# Altium PCB STM32H750-MotherBoard.PcbDoc
Units mil, origin at the board's own origin, x right, y up, seen from the top; angles counter-clockwise.
Board outline 3530.03 x 3200.03 mil, 2 copper layers (Top Layer, Bottom Layer); 45 components, 103 nets, 321 pads, 511 vias.
Unrouted connection lines stored in the file: 34.
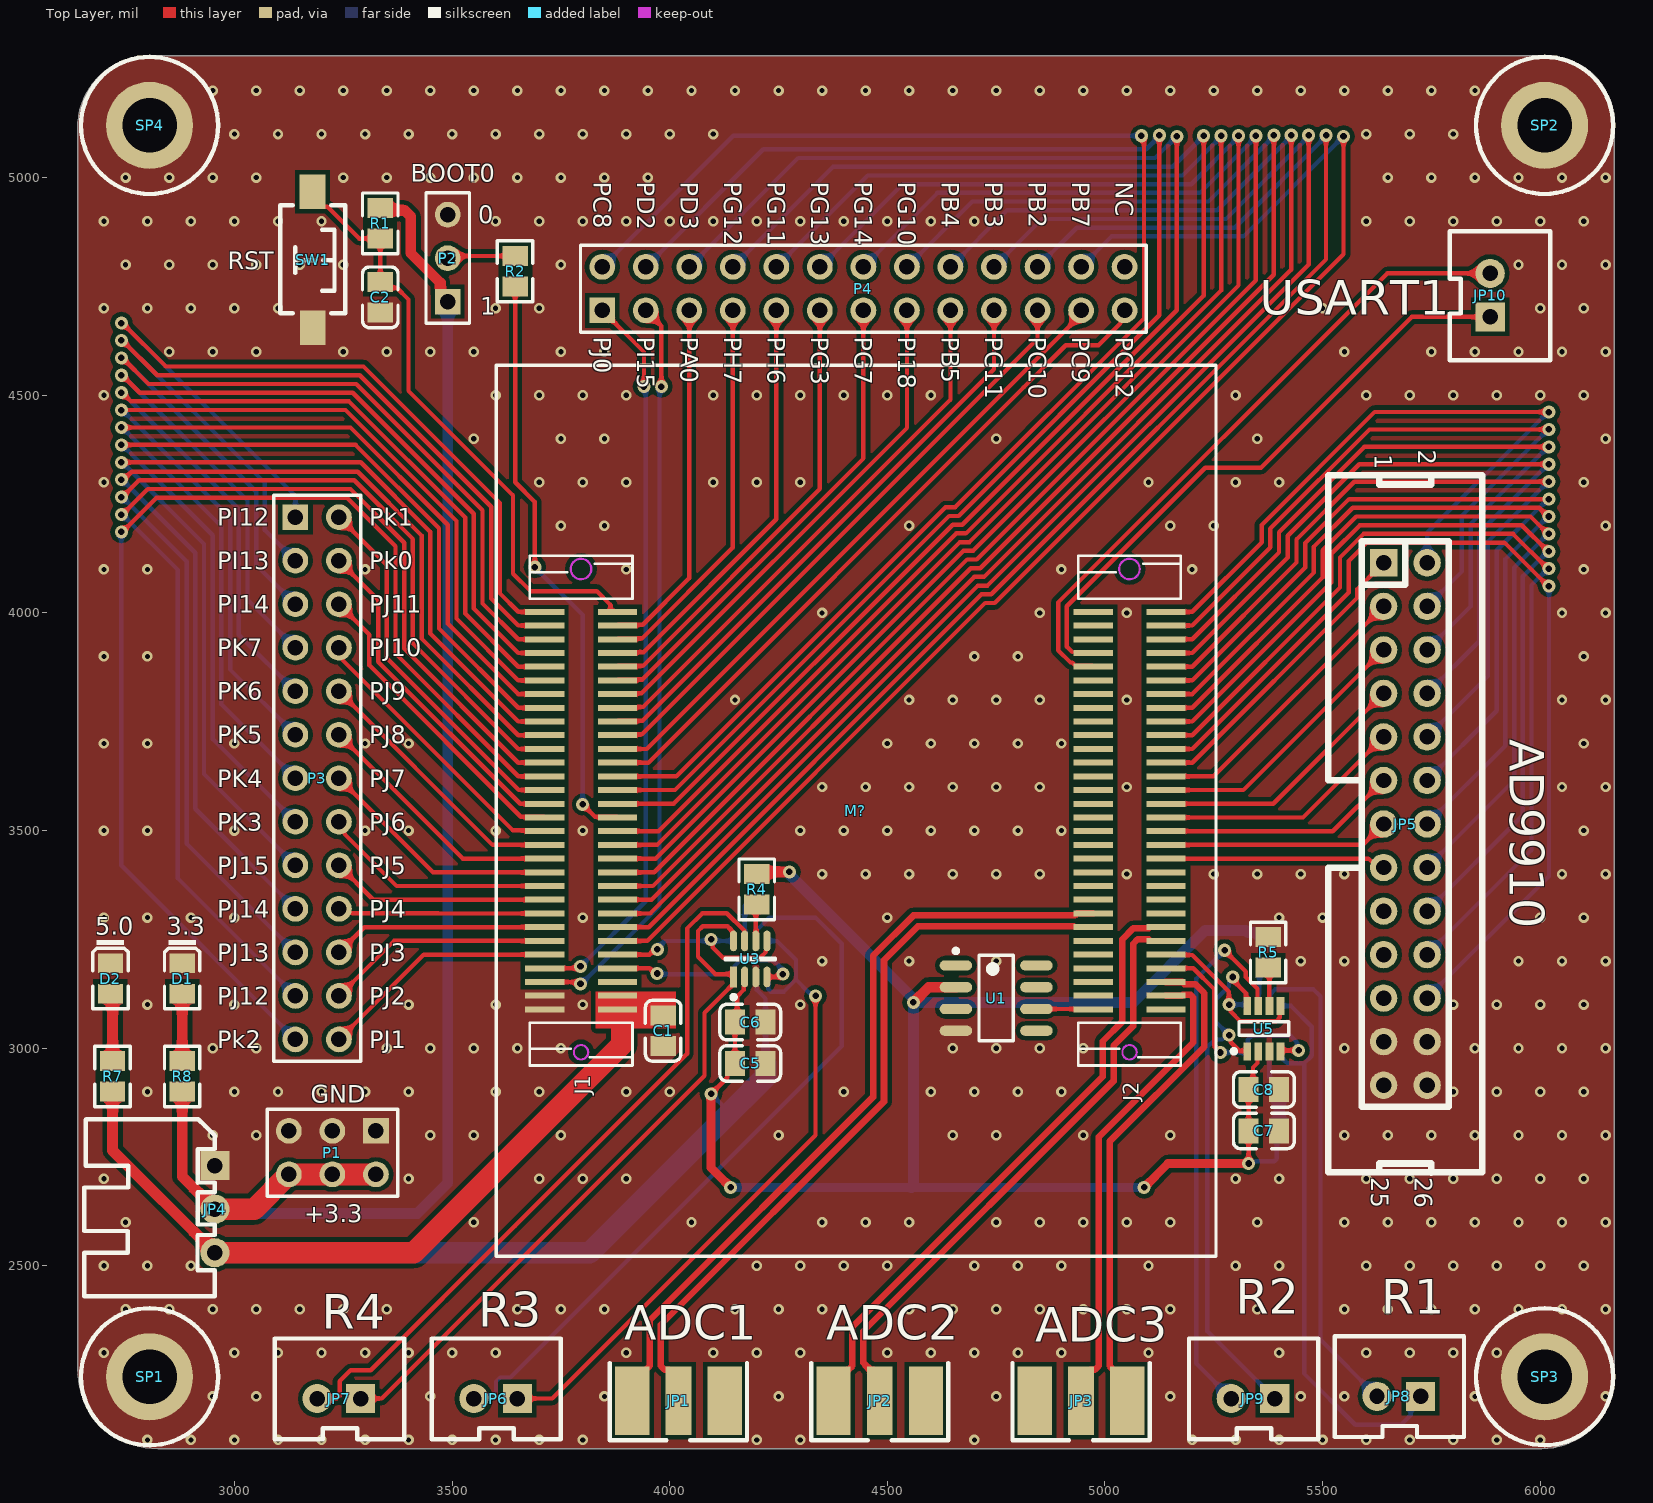
[diagram p0: Top Layer view]
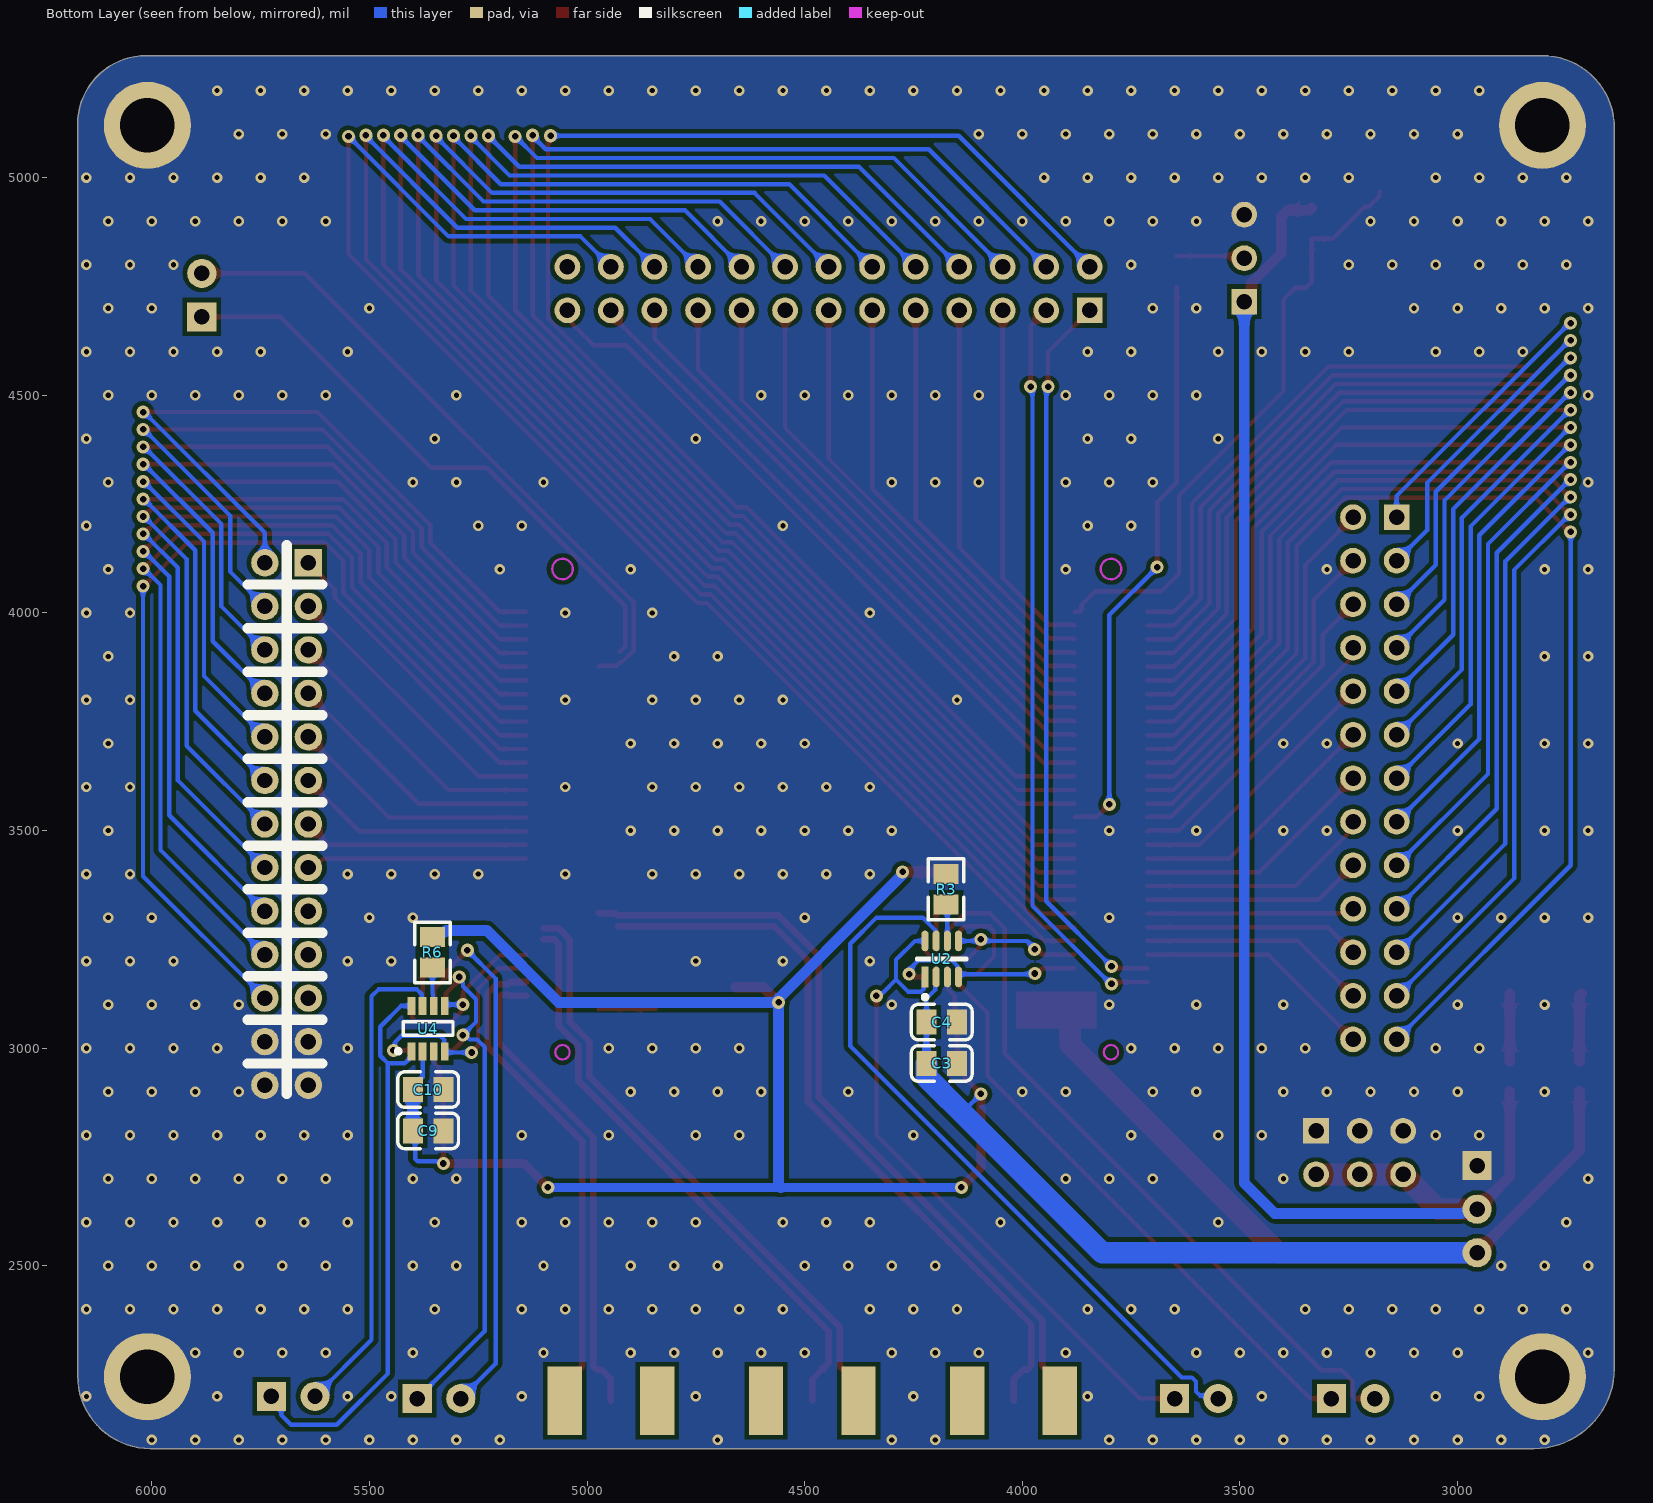
[diagram p1: Bottom Layer view, seen from below]
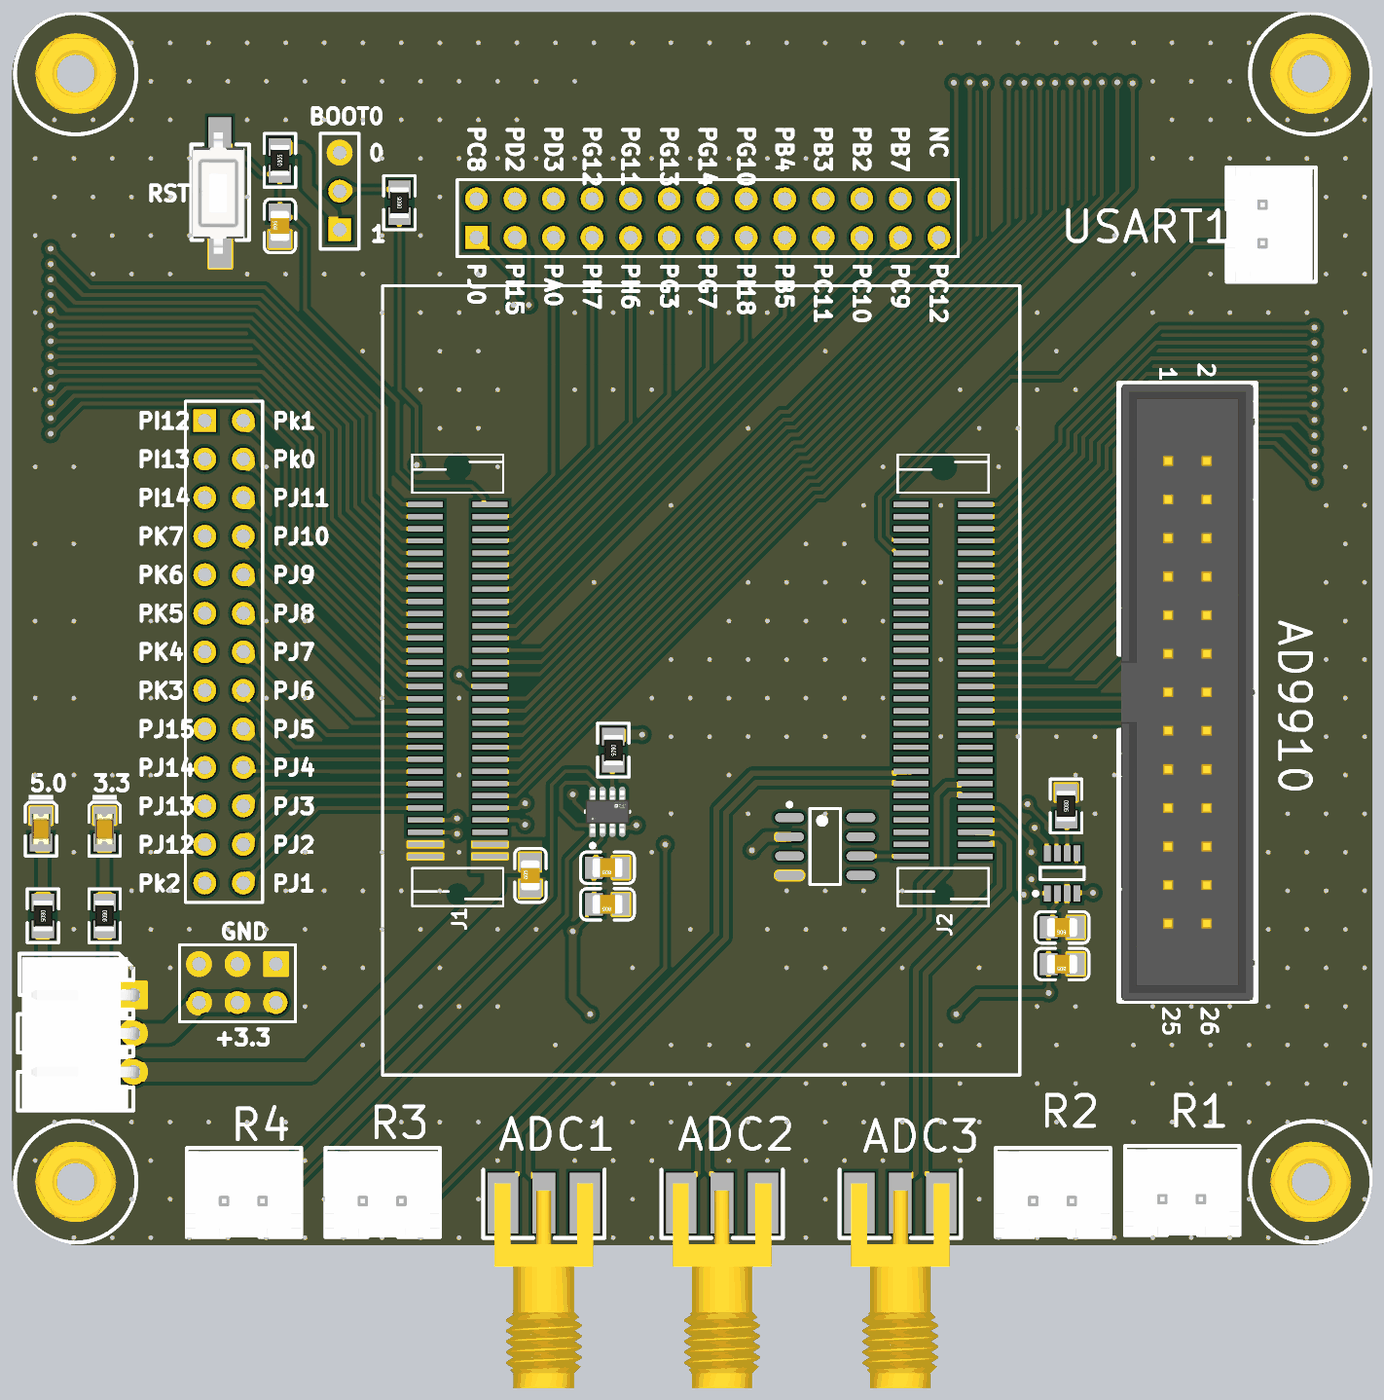
[diagram p2: 3D render of the assembled board from above, using the file's embedded part models]
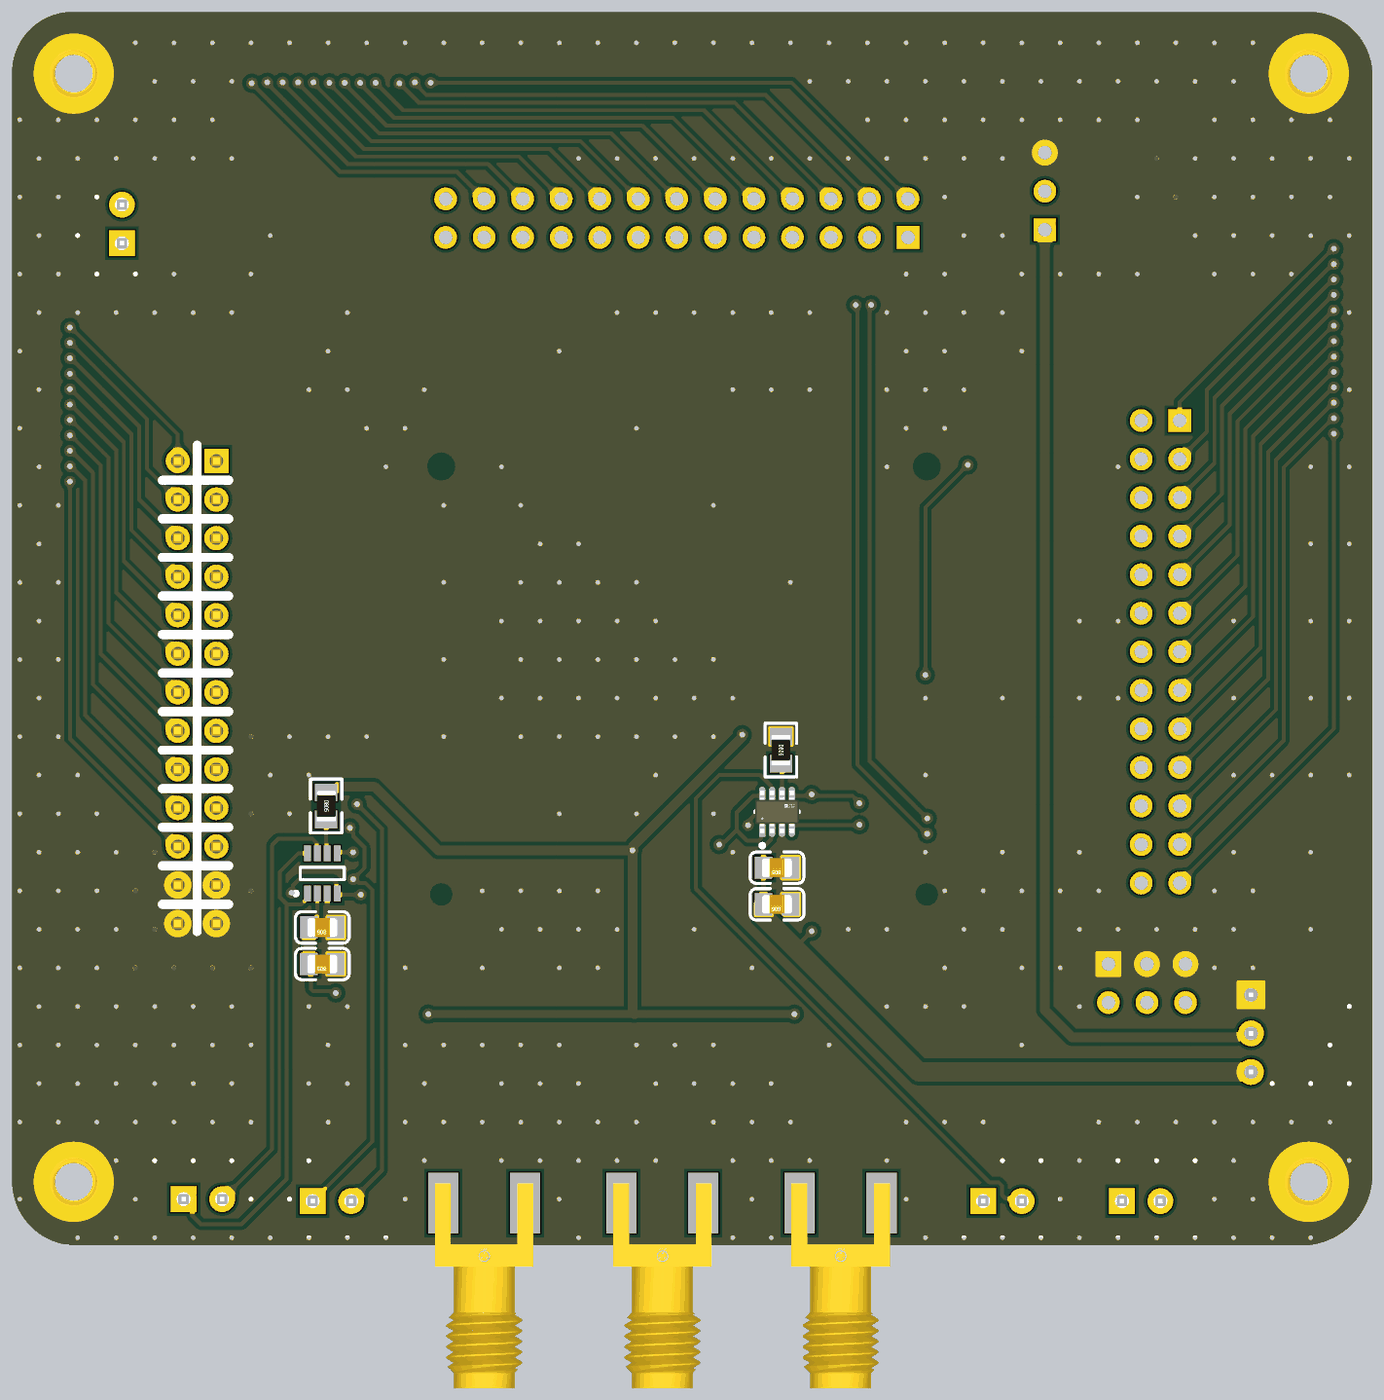
[diagram p3: 3D render of the assembled board from below, using the file's embedded part models]

## Layer stack, top to bottom
Top Solder: solder mask 0.4, Solder Resist, Dk 3.5
Top Layer: signal copper 1.4
Dielectric 1: dielectric 12.6, FR-4, Dk 4.8
Bottom Layer: signal copper 1.4
Bottom Solder: solder mask 0.4, Solder Resist, Dk 3.5

## Board outline
2639.99,2264.16 2639.99,5115 cw(c2805,5115) 2805,5280.02 6012.95,5280.02 cw(c6012.95,5122.95) 6170.02,5122.95 6170.02,2247.08 cw(c6002.92,2247.08) 6002.92,2079.99 2824.16,2079.99 cw(c2824.16,2264.16)

## Design rules (kind name [scope] priority, off if disabled: settings)
Clearance [All] p1: gap=10 ignorepadtopadclearanceinfootprint=FALSE except(0: Arc-Hole Track-Hole SMDPad-SMDPad SMDPad-Hole THPad-Hole Via-Hole Fill-Hole Poly-Hole Region-Hole Text-Hole)
ComponentClearance [All] p1: gap=0 collisioncheckmode=3 verticalgap=0 showdistances=FALSE
DiffPairsRouting [All] p1: maxlimit=10 minlimit=10 mostfreqgap=10 toplayer_minwidth=15 toplayer_maxwidth=15 toplayer_prefwidth=15 bottomlayer_minwidth=15 bottomlayer_maxwidth=15 bottomlayer_prefwidth=15 maxuncoupledlength=500
PolygonConnect [All] p1: connectstyle=Direct reliefconductorwidth=10 reliefentries=4 polygonreliefangle="90 Angle" airgapwidth=10
RoutingVias [All] p1: holewidth=15 width=30 viastyle="Through Hole" minholewidth=15 minwidth=30 maxholewidth=28 maxwidth=50
SolderMaskExpansion [All] p1: expansion=4
Width [All] p1: maxlimit=50 minlimit=10 preferedwidth=10 minimp=50.000000 maximp=50.000000 favimp=50.000000
28 further rules are at their usual default settings.

## Classes and differential pairs
component class Sheet2: C3 C4 C5 C6 C7 C8 C9 C10 D1 D2 JP6 JP7 JP8 JP9 P1 P3 P4 R3 R4 R5 R6 R7 R8 SP1 SP2 SP3 SP4 U2 U3 U4 U5
component class Sheet1: C1 C2 JP1 JP2 JP3 JP4 JP5 JP10 M? P2 R1 R2 SW1 U1
differential pair ADC1_IN18: +ADC1_IN18_P -ADC1_IN18_N
differential pair ADC1_IN5: +ADC1_IN5_P -ADC1_IN5_N
differential pair ADC1_IN4: +ADC1_IN4_P -ADC1_IN4_N

## Components (designator, comment, footprint, x,y, rotation, side; value= is the part's Value field where it differs from the comment)
C1 "100nF(104) 10% 50V" 0805_C 3985,3040 r90 top
C2 "100nF(104) 10% 50V" 0805_C 3335,4725 r90 top
C3 "10uF (106) 10% 25V" 0805_C 4185,2964.96 r0 bottom
C4 "10uF (106) 10% 25V" 0805_C 4185,3059.96 r0 bottom
C5 "10uF (106) 10% 25V" 0805_C 4185,2964.96 r180 top
C6 "10uF (106) 10% 25V" 0805_C 4184.96,3059.96 r180 top
C7 "10uF (106) 10% 25V" 0805_C 5365,2810 r180 top
C8 "10uF (106) 10% 25V" 0805_C 5365,2905 r180 top
C9 "10uF (106) 10% 25V" 0805_C 5365,2810 r0 bottom
C10 "10uF (106) 10% 25V" 0805_C 5364.96,2905 r0 bottom
D1 "蓝灯 0805" 0805_LED_S1 2880,3160.04 r270 top
D2 "蓝灯 0805" 0805_LED_S1 2715,3160.04 r270 top
JP1 "SMA WIFI 天线接口" SMA-KE 4020,2190 r180 top
JP2 "SMA WIFI 天线接口" SMA-KE 4482.5,2190 r180 top
JP3 "SMA WIFI 天线接口" SMA-KE 4945,2190 r180 top
JP4 "HDR-1X3" XH2.54-WI-3P 2955,2630 r270 top
JP5 "Header 2X11" IDC2.54-LI-2x13P 5640,4115 r270 top locked
JP6 "HDR-1X2" XH2.54-LI-2P 3600,2195 r180 top
JP7 "HDR-1X2" XH2.54-LI-2P 3240,2195 r180 top
JP8 "HDR-1X2" XH2.54-LI-2P 5675,2200 r180 top
JP9 "HDR-1X2" XH2.54-LI-2P 5340,2195 r180 top
JP10 "HDR-1X2" XH2.54-LI-2P 5885,4730 r90 top
M? "STM32H7&F7_CB" STM32H7&F7_CB 5255.06,2522.04 r90 top locked
P1 "Header 3X2" HDR2X3 3325,2810 r180 top
P2 "Header 3" HDR1X3 3490,4715 r90 top
P3 "Header 13X2" HDR2X13 3140,4220 r270 top
P4 "Header 13X2" HDR2X13 3845,4695 r0 top
R1 "10KΩ (1002) ±1%" 0805_R 3335,4894.96 r90 top
R2 "10KΩ (1002) ±1%" 0805_R 3645,4785 r90 top
R3 "1KΩ (1001) ±1%" 0805_R 4175,3365 r270 bottom
R4 "1KΩ (1001) ±1%" 0805_R 4200,3364.92 r270 top
R5 "1KΩ (1001) ±1%" 0805_R 5375,3220.04 r270 top
R6 "1KΩ (1001) ±1%" 0805_R 5355,3220.04 r270 bottom
R7 "1KΩ (1001) ±1%" 0805_R 2720,2935.04 r270 top
R8 "1KΩ (1001) ±1%" 0805_R 2880,2935.04 r270 top
SP1 "M3铜柱" M3x4_L 2805,2245 r0 top
SP2 "M3铜柱" M3x4_L 6010,5120 r0 top
SP3 "M3铜柱" M3x4_L 6010,2245 r0 top
SP4 "M3铜柱" M3x4_L 2805,5120 r0 top
SW1 "3x6x5" "TSW SMD-3*6*2.5" 3180,4810 r270 top
U1 "ADR4530ARZ" ADI-R-8_L 4750,3115 r0 top
U2 "AD5245BRJZ10-R2" FP-RJ-8-IPC_C 4185,3204.96 r90 bottom
U3 "AD5245BRJZ10-R2" FP-RJ-8-IPC_C 4185,3204.96 r90 top
U4 "CAT5171TBI-50GT3" ONSC-SOT23-8-527AK-01_N 5365,3045 r90 bottom
U5 "CAT5171TBI-50GT3" ONSC-SOT23-8-527AK-01_N 5365,3045 r90 top

## Footprints (in the part's own frame and the unit in brackets; to place one, negate y for a bottom-side part, rotate by r counter-clockwise, add the part's x,y. Pads: shape width x height; smd on the part's side, far side on the other; paste and mask are expansions set on the pad)
0805_C [mm]
  rect 1.16x1.47 smd: 1(-0.89,0) 2(0.89,0)
  silkscreen extent -1.77,-1.04 1.77,1.04, body extent -1,-0.62 1,0.63, height 0.77
0805_LED_S1 [mm]
  rect 1.16x1.47 smd: A(0.89,0) K(-0.89,0)
  silkscreen extent -2.25,-1.04 1.77,1.03, body extent -1.01,-0.62 1.01,0.62, height 1.1
0805_R [mm]
  rect 1.16x1.47 smd: 1(-0.89,0) 2(0.89,0)
  silkscreen extent -1.77,-1.04 1.77,1.03, body extent -1,-0.62 1,0.63, height 0.49
ADI-R-8_L [mm] "SOIC, 8-Leads, Body 4.9x3.9mm, Pitch 1.27mm, IPC High Density"
  oval 1.9x0.6 smd: 1(-2.35,1.905) 2(-2.35,0.635) 3(-2.35,-0.635) 4(-2.35,-1.905) 5(2.35,-1.905) 6(2.35,-0.635) 7(2.35,0.635) 8(2.35,1.905)
  silkscreen extent -2.47,-2.5 1,2.88, body extent -2,-2.5 2,2.5, height 1.75
FP-RJ-8-IPC_C [mm]
  rect 1.205x0.415 smd paste+0 mask+0: 1(-1.05,0.975)
  rrect100% 1.205x0.415 smd paste+0 mask+0: 2(-1.05,0.325) 3(-1.05,-0.325) 4(-1.05,-0.975) 5(1.05,-0.975) 6(1.05,-0.325) 7(1.05,0.325) 8(1.05,0.975)
  silkscreen extent -2.35,-1.45 0.05,1.45, body extent -1.4,-1.45 1.4,1.45, height 1.45
HDR1X3 [mm] "Connector; Header; 3 Position"
  rect 1.5x1.5 hole 0.9: 1(0,0)
  round 1.5 hole 0.9: 2(2.54,0) 3(5.08,0)
  silkscreen extent -1.27,-1.27 6.35,1.27
HDR2X3 [mm] "Connector; Header; 3x2 Position"
  rect 1.5x1.5 hole 0.9: 1(0,0)
  round 1.5 hole 0.9: 2(0,2.54) 3(2.54,0) 4(2.54,2.54) 5(5.08,0) 6(5.08,2.54)
  silkscreen extent -1.27,-1.27 6.35,3.81
HDR2X13 [mm] "Connector; Header; 13x2 Position"
  rect 1.5x1.5 hole 0.9: 1(0,0)
  round 1.5 hole 0.9: 2(0,2.54) 3(2.54,0) 4(2.54,2.54) 5(5.08,0) 6(5.08,2.54) 7(7.62,0) 8(7.62,2.54) 9(10.16,0) 10(10.16,2.54) 11(12.7,0) 12(12.7,2.54) 13(15.24,0) 14(15.24,2.54) 15(17.78,0) 16(17.78,2.54) 17(20.32,0) 18(20.32,2.54) 19(22.86,0) 20(22.86,2.54) 21(25.4,0) 22(25.4,2.54) 23(27.94,0) 24(27.94,2.54) 25(30.48,0) 26(30.48,2.54)
  silkscreen extent -1.27,-1.27 31.75,3.81
IDC2.54-LI-2x13P [mm] "26P简易牛角座"
  rect 1.6x1.6 hole 0.9: 1(0,0)
  round 1.6 hole 0.9: 2(0,2.54) 3(2.54,0) 4(2.54,2.54) 5(5.08,0) 6(5.08,2.54) 7(7.62,0) 8(7.62,2.54) 9(10.16,0) 10(10.16,2.54) 11(12.7,0) 12(12.7,2.54) 13(15.24,0) 14(15.24,2.54) 15(17.78,0) 16(17.78,2.54) 17(20.32,0) 18(20.32,2.54) 19(22.86,0) 20(22.86,2.54) 21(25.4,0) 22(25.4,2.54) 23(27.94,0) 24(27.94,2.54) 25(30.48,0) 26(30.48,2.54)
  silkscreen extent -5.11,-3.23 35.59,5.77, body extent -5.08,-3.08 35.56,5.77, height 9.17
M3x4_L [mil] "M3铜柱，长：4mm"
  round 200 hole 125: 1(0,0)
  silkscreen extent -157,-157 157,157, body extent -106,-93 106,93, height 159
ONSC-SOT23-8-527AK-01_N [mm] "SOT23, 8-Leads, Body 2.9x1.6mm, Pitch 0.65mm, IPC Medium Density"
  rect 1.05x0.45 smd: 1(-1.325,0.975) 2(-1.325,0.325) 3(-1.325,-0.325) 4(-1.325,-0.975) 5(1.325,-0.975) 6(1.325,-0.325) 7(1.325,0.325) 8(1.325,0.975)
  silkscreen extent -1.45,-1.45 0.4,1.88, body extent -0.8,-1.45 0.8,1.45, height 1.45
SMA-KE [mm] "SMA 偏脚射频天线座     淘宝ID:黄晶宝石"
  rect 1.5x4 smd: 1(0,0)
  rect 2x4 smd: 2(-2.7,0) 2(2.7,0)
  rect 2x4 smd far side: 3(-2.7,0) 3(2.7,0)
  silkscreen extent -4,-2.2 4,2.3, body extent -3.25,-1.3 3.25,12.2, height 3.75
STM32H7&F7_CB [mm]
  rect 0.35x2.3 smd: J1_1(37.601,34.927) J1_2(36.801,34.927) J1_3(36.001,34.927) J1_4(35.201,34.927) J1_5(34.401,34.927) J1_6(33.601,34.927) J1_7(32.801,34.927) J1_8(32.001,34.927) J1_9(31.201,34.927) J1_10(30.401,34.927) J1_11(29.601,34.927) J1_12(28.801,34.927) J1_13(28.001,34.927) J1_14(27.201,34.927) J1_15(26.401,34.927) J1_16(25.601,34.927) J1_17(24.801,34.927) J1_18(24.001,34.927) J1_19(23.201,34.927) J1_20(22.401,34.927) J1_21(21.601,34.927) J1_22(20.801,34.927) J1_23(20.001,34.927) J1_24(19.201,34.927) J1_25(18.401,34.927) J1_26(17.601,34.927) J1_27(16.801,34.927) J1_28(16.001,34.927) J1_29(15.201,34.927) J1_30(14.401,34.927) J1_31(14.401,39.181) J1_32(15.201,39.181) J1_33(16.001,39.181) J1_34(16.801,39.181) J1_35(17.601,39.181) J1_36(18.401,39.181) J1_37(19.201,39.181) J1_38(20.001,39.181) J1_39(20.801,39.181) J1_40(21.601,39.181) J1_41(22.401,39.181) J1_42(23.201,39.181) J1_43(24.001,39.181) J1_44(24.801,39.181) J1_45(25.601,39.181) J1_46(26.401,39.181) J1_47(27.201,39.181) J1_48(28.001,39.181) J1_49(28.801,39.181) J1_50(29.601,39.181) J1_51(30.401,39.181) J1_52(31.201,39.181) J1_53(32.001,39.181) J1_54(32.801,39.181) J1_55(33.601,39.181) J1_56(34.401,39.181) J1_57(35.201,39.181) J1_58(36.001,39.181) J1_59(36.801,39.181) J1_60(37.601,39.181) J2_1(37.601,2.919) J2_2(36.801,2.919) J2_3(36.001,2.919) J2_4(35.201,2.919) J2_5(34.401,2.919) J2_6(33.601,2.919) J2_7(32.801,2.919) J2_8(32.001,2.919) J2_9(31.201,2.919) J2_10(30.401,2.919) J2_11(29.601,2.919) J2_12(28.801,2.919) J2_13(28.001,2.919) J2_14(27.201,2.919) J2_15(26.401,2.919) J2_16(25.601,2.919) J2_17(24.801,2.919) J2_18(24.001,2.919) J2_19(23.201,2.919) J2_20(22.401,2.919) J2_21(21.601,2.919) J2_22(20.801,2.919) J2_23(20.001,2.919) J2_24(19.201,2.919) J2_25(18.401,2.919) J2_26(17.601,2.919) J2_27(16.801,2.919) J2_28(16.001,2.919) J2_29(15.201,2.919) J2_30(14.401,2.919) J2_31(14.401,7.173) J2_32(15.201,7.173) J2_33(16.001,7.173) J2_34(16.801,7.173) J2_35(17.601,7.173) J2_36(18.401,7.173) J2_37(19.201,7.173) J2_38(20.001,7.173) J2_39(20.801,7.173) J2_40(21.601,7.173) J2_41(22.401,7.173) J2_42(23.201,7.173) J2_43(24.001,7.173) J2_44(24.801,7.173) J2_45(25.601,7.173) J2_46(26.401,7.173) J2_47(27.201,7.173) J2_48(28.001,7.173) J2_49(28.801,7.173) J2_50(29.601,7.173) J2_51(30.401,7.173) J2_52(31.201,7.173) J2_53(32.001,7.173) J2_54(32.801,7.173) J2_55(33.601,7.173) J2_56(34.401,7.173) J2_57(35.201,7.173) J2_58(36.001,7.173) J2_59(36.801,7.173) J2_60(37.601,7.173)
  Keep-Out Layer circle w0.127: c11.901,37.054 r0.42
  Keep-Out Layer circle w0.127: c40.101,37.054 r0.6
  Keep-Out Layer circle w0.127: c11.901,5.046 r0.42
  Keep-Out Layer circle w0.127: c40.101,5.046 r0.6
  silkscreen extent 0,0 52,42
"TSW SMD-3*6*2.5" [mm] "3*6*2.5mm"
  rect 2x1.5 smd: 1(-3.996,-0.02) 2(3.937,0)
  silkscreen extent -3.21,-1.9 3.09,1.9, body extent -4,-1.88 4,1.62, height 2.59
XH2.54-LI-2P [mm] "接插件，2P"
  rect 1.7x1.7 hole 0.9: 1(-1.27,0)
  round 1.7 hole 0.9: 2(1.27,0)
  silkscreen extent -3.81,-3.51 3.74,2.37, body extent -3.77,-3.3 3.77,2.4, height 7.05
XH2.54-WI-3P [mm] "接插件，3P"
  rect 1.7x1.7 hole 0.9: 1(-2.54,0)
  round 1.7 hole 0.9: 2(0,0) 3(2.54,0)
  silkscreen extent -5.26,-7.62 5.08,0, body extent -5.04,-7.35 5.04,0.35, height 5.73

## Part data
C1 C2: library part "0805 100nF(104) 10% 50V", "贴片电容", Package=0805, SuppliersPartNumber=C49678, ComponentLink1Description=供应商链接, ComponentLink1URL=http://www.szlcsc.com/product/details_50686.html, Supplier=LC
C3 C4 C5 C6 C7 C8 C9 C10: library part "0805 10uF (106) 10% 25V", "贴片电容", Package=0805, SuppliersPartNumber=C15850, ComponentLink1Description=供应商链接, ComponentLink1URL=http://www.szlcsc.com/product/details_16532.html, Supplier=LC
D1 D2: library part "0805 蓝灯", "发光二极管", Package=0805, SuppliersPartNumber=C2293, ComponentLink1Description=供应商链接, ComponentLink1URL=http://www.szlcsc.com/product/details_2666.html, Supplier=LC
JP1 JP2 JP3: library part SMA, "SMA-2.4G射频天线接口"
JP4: library part "Header 3", "3P接插件", BOM名称=3P接插件
JP5: library part "Header 13X2", "13*2P接插件", BOM名称=13*2P接插件
JP6 JP7 JP8 JP9 JP10: library part "Header 2", "2P接插件", BOM名称=2P接插件
M?: "H750/F750 Core Board"
P1: "Header, 3-Pin, Dual row", LatestRevisionDate=17-Jul-2002, LatestRevisionNote="Re-released for DXP Platform.", Publisher="Altium Limited"
P2: "Header, 3-Pin", LatestRevisionDate=17-Jul-2002, LatestRevisionNote="Re-released for DXP Platform.", Publisher="Altium Limited"
P3 P4: "Header, 13-Pin, Dual row", LatestRevisionDate=17-Jul-2002, LatestRevisionNote="Re-released for DXP Platform.", Publisher="Altium Limited"
R1 R2: library part "0805 10KΩ (1002) 1%", "贴片电阻", Package=0805, SuppliersPartNumber=C17414, ComponentLink1Description=供应商链接, ComponentLink1URL=http://www.szlcsc.com/product/details_18102.html, Supplier=LC
R3 R4 R5 R6 R7 R8: library part "0805 1KΩ (1001) 1%", "贴片电阻", Package=0805, SuppliersPartNumber=C17513, ComponentLink1Description=供应商链接, ComponentLink1URL=http://www.szlcsc.com/product/details_18201.html, Supplier=LC
SP1 SP2 SP3 SP4: library part 铜柱小焊盘, "铜柱"
SW1: library part "TSW 3x6", "3x6轻触开关", BOM名称=3x6轻触开关
U1: library part CMP-0784-00168-1, "Ultralow Noise, High Accuracy Voltage Reference, 3 V Output, 3 to 15 V Supply, Industrial, 8-pin SOIC (R-8), Tube", Manufacturer="Analog Devices", Operating Temp Range="-40 to 125 degC", Code_JEDEC=MS-012-AA, ComponentLink1Description="Manufacturer URL", ComponentLink1URL=http://www.analog.com/en/index.html, ComponentLink2Description=Datasheet, ComponentLink2URL=http://www.analog.com/static/imported-files/data_sheets/ADR4520_4525_4530_4533_4540_4550.pdf, ComponentLink3Description="Package Specification", ComponentLink3URL=http://www.analog.com/static/imported-files/packages/PKG_PDF/SOIC_Narrow%20(R)/R_8.pdf, ComponentLink4Description="URL Link1", ComponentLink4URL="Product URL:http://www.analog.com/en/special-linear-functions/voltage-references/adr4530/products/product.html", DatasheetVersion="Rev. 0", Max V Supply (V)=15, Min V Supply (V)=3, Mounting Technology="Surface Mount", PackageDescription="8-Pin Standard Small Outline Package, Body 4.9 x 3.9 mm, Pitch 1.27 mm", PackageReference=R-8, PackageVersion="060506-A, 06/2006", Packing=Tube, PartNumber=ADR4530ARZ, Ref Out TC (ppm/C)=4, Vout=3V
U2 U3: library part CMP-09083-000005-1, "IC DGT POT 10KOHM 256TAP SOT23-8", Manufacturer="Analog Devices", Max Junction Temp=+150°C, Max Supply Voltage=5.5V, Min Supply Voltage=2.7V, Nominal Resistance=10kΩ, Nominal Supply Current=3uA, Package=RJ-8, Temperature="-40°C to +125°C", Temperature Coefficient=45ppm/°C, Temperature Range High=+125°C, Temperature Range Low=-40°C, Tolerance=30%, Automotive=No, Category=IC, ComponentLink2Description=Datasheet, ComponentLink2URL=https://www.analog.com/media/en/technical-documentation/data-sheets/AD5245.pdf, Device Class L1="Integrated Circuits (ICs)", Device Class L2="Data Converter ICs", Device Class L3="Digital Potentiometers", Digikey Description="IC DGT POT 10KOHM 256TAP SOT23-8", Footprint Url=https://www.analog.com/media/en/package-pcb-resources/package/pkg_pdf/sot-23rj/RJ_8.pdf, Height=1.45mm, Interface=I2C, Ipc Land Pattern Name=SOT65P280X120-8, Lead Free=Yes, Manufacturer Part Number=AD5245BRJZ10-R2, Mouser Description="Digital Potentiometer ICs IC 256-pos I2C", Number Of Circuits=1, Number Of Taps=256, Octopart=https://octopart.com/ad5245brjz10-r2-analog+devices-446714, RoHS=TRUE, Standoff Height=0.05mm
U4 U5: library part CMP-1317-00202-1, "256-Position I2C Compatible Digital Potentiometer (POT), -40 to 85 degC, 8-Pin SOT23, Pb-Free, Tape and Reel", Manufacturer="On Semiconductor", # of Pots=1, # of Taps=256, Code_JEDEC=MO-178, ComponentLink1Description="Manufacturer URL", ComponentLink1URL=http://www.onsemi.com/, ComponentLink2Description=Datasheet, ComponentLink2URL=http://www.onsemi.com/pub_link/Collateral/CAT5171-D.PDF, ComponentLink3Description="Package Specification", ComponentLink3URL=http://www.onsemi.com/pub_link/Collateral/527AK.PDF, Control Interface=I2C, DatasheetVersion="Rev. 2", Mounting Technology="Surface Mount", PackageDescription="8-Pin Small Outline Transistor, Body 2.9 x 1.6 mm, Pitch 0.65 mm", PackageReference=SOT23-8-527AK-01, PackageVersion="Rev. A, 03/2009", Packing="Tape and Reel", PartNumber=CAT5171TBI-50GT3, RoHS=TRUE, Type=Potentiometer, VDD Max (V)=5.5

## Via types
v1: diameter 24, hole 12, Top Layer to Bottom Layer, tented both sides, 452 vias
v2: diameter 30, hole 15, Top Layer to Bottom Layer, tented both sides, 59 vias

## Nets (pads, with @x,y where several pads share a name; then routed paths per layer and width w, separated by ;. In a path a pad name is that pad's centre, name@x,y a point inside that pad or via, vN(x,y) a via of type N, cw(c..) or ccw(c..) an arc to the next point about the centre after c; other vN are vias at no path point)
+3.3: JP4.2 P1.2 P1.4 P1.6 P2.1 R1.2 R8.2 | length 3606
  Top Layer w25: R8.2 2880,2705 JP4.2 ; R1.2 3340,4925 3390.36,4925 3405,4910.36 3405,4826.42 3472.97,4758.45 3472.97,4732.03 P2.1
  Top Layer w50: JP4.2 3045,2630 P1.6 P1.4 P1.2
  Bottom Layer w25: JP4.2 2963.02,2621.98 2988.63,2621.98 2990.61,2620 3420,2620 3490,2690 P2.1
+5: C1.2 C3.2 C4.2 C5.2 C6.2 C7.2 C8.2 C9.2 C10.2 JP4.3 M?.J1_29 M?.J1_30 R4.1 R6.1 R7.2 U1.2 U2.2 U3.2 U4.2 U5.2 | length 7631.7
  Top Layer w10: v2(4095,2895) 4132.13,2932.13 4132.13,2947.13 C5.2 4149.92,2965 C6.2 4155,3065.04 4155,3118.88 4169.78,3133.66 4169.78,3141.14 4170.99,3142.35 4170.99,3162.39 U3.2 ; v2(5330,2735) v2(5330,2735) C7.2 C8.2 5340,2915.04 5340,2955.48 5350.47,2965.95 5350.47,2991.1 U5.2
  Top Layer w20: v2(4095,2895) 4095,2725 v2(4140,2680) ; v2(5090,2680) 5145,2735 v2(5330,2735)
  Top Layer w25: R7.2 2720,2765 JP4.3 ; R4.1 4205.04,3405 v2(4275,3405) ; v2(4560,3105) 4595,3140 U1.2
  Top Layer w50: JP4.3 3412.09,2530 3890,3007.91 3890,3060
  Bottom Layer w10: v2(4095,2895) 4128.13,2861.87 4148.13,2861.87 ; U2.2 4199.01,3162.39 4199.01,3142.35 4200.22,3141.14 4200.22,3133.66 4220.04,3113.84 C4.2 C3.2 ; v2(5330,2735) 5333.83,2738.83 5344.68,2738.83 5345.86,2740 5389.14,2740 5395,2745.86 5395,2804.96 C9.2 ; U4.2 5377.8,2933.31 5400,2911.1 C10.2
  Bottom Layer w20: v2(4140,2680) 4555,2680 v2(5090,2680)
  Bottom Layer w25: v2(4275,3405) 4275.96,3404.04 4275.96,3397.93 4346.39,3327.5 4559.04,3114.85 4559.04,3105.96 v2(4560,3105) ; 4555,2680 4560,2685 v2(4560,3105) ; R6.1 5344.67,3265.41 5328.5,3265.41 5323.92,3270 5230,3270 5065,3105 v2(4560,3105) ; C10.2 C10.2 C9.2
  Bottom Layer w50: JP4.3@2959.43,2530 3816.27,2530 4148.13,2861.87 4220.04,2933.77 C3.2
A1: M?.J1_60 P3.1 | length 1982.2
  Top Layer w10: v2(2740,4665.98) 2742.43,4665.98 2842.43,4565.98 3296.4,4565.98 3610,4252.38 3610,4044.65 3652.24,4002.4 M?.J1_60
  Bottom Layer w10: v2(2740,4665.98) 2742.43,4665.98 3140,4268.41 P3.1
A2: M?.J1_59 P3.3 | length 2040.5
  Top Layer w10: v2(2740,4625.98) 2742.43,4625.98 2822.43,4545.98 3288.11,4545.98 3590,4244.1 3590,4033.15 3652.24,3970.91 M?.J1_59
  Bottom Layer w10: v2(2740,4625.98) 2742.43,4625.98 3070,4298.41 3070,4190 P3.3
A3: M?.J1_58 P3.5 | length 2098.9
  Top Layer w10: v2(2740,4585.98) 2742.43,4585.98 2802.43,4525.98 3279.83,4525.98 3570,4235.81 3570,4021.65 3652.24,3939.41 M?.J1_58
  Bottom Layer w10: v2(2740,4585.98) 2742.43,4585.98 3050,4278.41 3050,4110 P3.5
A4: M?.J1_57 P3.7 | length 2157.2
  Top Layer w10: v2(2740,4545.98) 2742.43,4545.98 2782.43,4505.98 3271.55,4505.98 3550,4227.53 3550,4010.16 3652.24,3907.91 M?.J1_57
  Bottom Layer w10: v2(2740,4545.98) 2742.43,4545.98 3030,4258.41 3030,4030 P3.7
A5: M?.J1_56 P3.9 | length 2215.6
  Top Layer w10: v2(2740,4505.98) 2742.43,4505.98 2762.43,4485.98 3263.26,4485.98 3530,4219.25 3530,3998.66 3652.24,3876.42 M?.J1_56
  Bottom Layer w10: v2(2740,4505.98) 2742.43,4505.98 3010,4238.41 3010,3950 P3.9
A6: M?.J1_55 P3.11 | length 2274
  Top Layer w10: v2(2740,4465.98) 3254.98,4465.98 3510,4210.96 3510,3987.17 3652.24,3844.92 M?.J1_55
  Bottom Layer w10: v2(2740,4465.98) 2742.43,4465.98 2990,4218.41 2990,3870 P3.11
A7: M?.J1_54 P3.13 | length 2332.3
  Top Layer w10: v2(2740,4425.98) 3266.69,4425.98 3490,4202.68 3490,3975.67 3652.24,3813.43 M?.J1_54
  Bottom Layer w10: v2(2740,4425.98) 2742.43,4425.98 2970,4198.41 2970,3790 P3.13
A8: M?.J1_53 P3.15 | length 2390.7
  Top Layer w10: v2(2740,4385.98) 3278.41,4385.98 3470,4194.39 3470,3964.17 3652.24,3781.93 M?.J1_53
  Bottom Layer w10: v2(2740,4385.98) 2742.43,4385.98 2950,4178.41 2950,3710 P3.15
A9: M?.J1_52 P3.17 | length 2449
  Top Layer w10: v2(2740,4345.98) 3290.12,4345.98 3450,4186.11 3450,3952.68 3652.24,3750.43 M?.J1_52
  Bottom Layer w10: v2(2740,4345.98) 2742.43,4345.98 2930,4158.41 2930,3630 P3.17
A10: M?.J1_51 P3.19 | length 2522.8
  Top Layer w10: v2(2740,4305.98) 2745.34,4305.98 2763.88,4324.53 3283.3,4324.53 3430,4177.82 3430,3941.18 3652.24,3718.94 M?.J1_51
  Bottom Layer w10: v2(2740,4305.98) 2742.43,4305.98 2910,4138.41 2910,3550 P3.19
A11: M?.J1_50 P3.21 | length 2597.7
  Top Layer w10: v2(2740,4265.98) 2742.43,4265.98 2780.97,4304.53 3275.01,4304.53 3410,4169.54 3410,3929.69 3652.24,3687.44 M?.J1_50
  Bottom Layer w10: v2(2740,4265.98) 2742.43,4265.98 2890,4118.41 2890,3470 P3.21
A12: M?.J1_49 P3.23 | length 2672.6
  Top Layer w10: v2(2740,4225.98) 2742.43,4225.98 2800.97,4284.53 3266.73,4284.53 3390,4161.26 3390,3918.19 3652.24,3655.94 M?.J1_49
  Bottom Layer w10: v2(2740,4225.98) 2742.43,4225.98 2870,4098.41 2870,3390 P3.23
A13: M?.J1_48 P3.25 | length 2746.1
  Top Layer w10: v2(2740,4185.98) 2742.43,4185.98 2820.97,4264.53 3258.44,4264.53 3370,4152.97 3370,3906.69 3652.24,3624.45 M?.J1_48
  Bottom Layer w10: v2(2740,4185.98) 2740,3420 P3.25
A14: M?.J1_47 P3.2 | length 857.5
  Top Layer w10: P3.2 3350,4110 3350,3896.16 3653.21,3592.95 M?.J1_47
A15: M?.J1_46 P3.4 | length 787.1
  Top Layer w10: P3.4 3330,4030 3330,3887.88 3656.42,3561.46 M?.J1_46
A16: M?.J1_45 P3.6 | length 716.7
  Top Layer w10: P3.6 3310,3950 3310,3879.6 3657.75,3531.85 3710.63,3531.85 M?.J1_45
A17: M?.J1_44 P3.8 | length 658.8
  Top Layer w10: P3.8 3249.39,3910.61 3249.39,3890.61 3639.65,3500.35 3710.63,3500.35 M?.J1_44
A18: M?.J1_43 P3.10 | length 618.8
  Top Layer w10: P3.10 3593.03,3466.97 M?.J1_43
A19: M?.J1_42 P3.12 | length 590.4
  Top Layer w10: P3.12 3524.53,3435.47 M?.J1_42
A20: M?.J1_41 P3.14 | length 562
  Top Layer w10: P3.14 3456.02,3403.98 M?.J1_41
A21: M?.J1_40 P3.16 | length 542.4
  Top Layer w10: P3.16 3240,3506.73 3253.99,3492.74 3253.99,3491.01 3372.52,3372.48 M?.J1_40
A22: M?.J1_39 P3.18 | length 505.2
  Top Layer w10: P3.18 3319.02,3340.98 M?.J1_39
A23: M?.J1_38 P3.20 | length 476.9
  Top Layer w10: P3.20 3249.39,3310.61 3269.77,3310.61 3270.39,3310 3467.5,3310 3468.02,3309.49 M?.J1_38
A24: M?.J1_37 P3.22 | length 496.5
  Top Layer w10: P3.22 3297.99,3277.99 M?.J1_37
A25: M?.J1_36 P3.24 | length 524.9
  Top Layer w10: P3.24 3366.5,3246.5 M?.J1_36
A26: M?.J1_35 P3.26 | length 553.3
  Top Layer w10: P3.26 3435,3215 M?.J1_35
A27: M?.J1_34 P4.1 | length 1695
  Top Layer w10: M?.J1_34 3790.75,3183.5 v2(3795,3187.76) ; P4.1 3940.75,4599.25 v2(3940.75,4520)
  Bottom Layer w10: v2(3795,3187.76) 3945,3337.76 3945,4515.75 v2(3940.75,4520)
A28: M?.J1_33 P4.3 | length 1724.7
  Top Layer w10: M?.J1_33 3790.75,3152.01 v2(3795,3147.76) ; P4.3 3980.75,4659.25 v2(3980.75,4520)
  Bottom Layer w10: v2(3795,3147.76) 3797.43,3147.76 3976.5,3326.83 3976.5,4515.75 v2(3980.75,4520)
ADC1_IN4_N: JP1.2 JP1.3 M?.J2_38 | length 1797.2
  Top Layer w15: JP1.2@3913.7,2190 3913.7,2229.37 3954.35,2270.02 3954.35,2374.71 4467.32,2887.68 4467.32,3212.32 4560,3305 4930.99,3305 4935.48,3309.49 M?.J2_38
ADC1_IN4_P: JP1.1 M?.J2_37 | length 1715.6
  Top Layer w15: JP1.1 4020,2239.21 3997.97,2261.24 3988.14,2261.24 3979.35,2270.03 3979.35,2364.35 4492.32,2877.32 4492.32,3201.97 4570.36,3280 M?.J2_37@4928.52,3280
ADC1_IN5_N: JP2.2 JP2.3 M?.J2_24 | length 1407.2
  Top Layer w15: JP2.2@4376.2,2190 4376.2,2229.37 4408.07,2261.24 4410.95,2261.24 4419.73,2270.03 4419.73,2359.73 4994.85,2934.85 4994.85,3016.08 5040,3061.23 5040,3250.36 5064.64,3275 M?.J2_24@5100,3275
ADC1_IN5_P: JP2.1 M?.J2_25 | length 1361.7
  Top Layer w15: JP2.1 4482.5,2239.21 4444.73,2276.98 4444.73,2349.38 5019.85,2924.5 5019.85,3005.72 5065,3050.87 5065,3240 5075,3250 M?.J2_25@5100,3250
ADC1_IN18_N: JP3.2 JP3.3 M?.J2_28 | length 1141.7
  Top Layer w15: JP3.2@5051.3,2190 5051.3,2229.37 5010.65,2270.02 5010.65,2785.65 5227.9,3002.9 5227.9,3126.57 5207.14,3147.33 5181.97,3147.33 5177.29,3152.01 M?.J2_28
ADC1_IN18_P: JP3.1 M?.J2_29 | length 1104.9
  Top Layer w15: JP3.1 4945,2239.21 4967.03,2261.24 4976.86,2261.24 4985.65,2270.03 4985.65,2796.01 5202.9,3013.26 5202.9,3116.21 5196.79,3122.33 5179.11,3122.33 5177.29,3120.51 M?.J2_29
B1: M?.J1_2 P4.5 | length 825.2
  Top Layer w10: M?.J1_2 3881.89,3972.8 3937.8,3972.8 4045,4080 P4.5
B2: M?.J1_3 P4.7 | length 897.2
  Top Layer w10: M?.J1_3 3881.89,3941.3 3936.3,3941.3 4145,4150 P4.7
B3: M?.J1_4 P4.9 | length 972.2
  Top Layer w10: M?.J1_4 3881.89,3909.8 3939.8,3909.8 4245,4215 P4.9
B4: M?.J1_5 P4.11 | length 1044.2
  Top Layer w10: M?.J1_5 3881.89,3878.31 3938.31,3878.31 4345,4285 P4.11
B5: M?.J1_6 P4.13 | length 1116.3
  Top Layer w10: M?.J1_6 3881.89,3846.81 3936.81,3846.81 4445,4355 P4.13
B6: M?.J1_7 P4.15 | length 1188.3
  Top Layer w10: M?.J1_7 3881.89,3815.32 3935.32,3815.32 4545,4425 P4.15
B7: M?.J1_8 P4.17 | length 1263.3
  Top Layer w10: M?.J1_8 3881.89,3783.82 3938.82,3783.82 4645,4490 P4.17
B8: M?.J1_9 P4.19 | length 1335.3
  Top Layer w10: M?.J1_9 3881.89,3752.32 3937.32,3752.32 4745,4560 P4.19
B9: M?.J1_10 P4.21 | length 1407.4
  Top Layer w10: M?.J1_10 3881.89,3720.83 3935.83,3720.83 4845,4630 P4.21
B10: M?.J1_11 P4.23 | length 1488.2
  Top Layer w10: M?.J1_11 3947.44,3687.44 4945,4685 P4.23
B11: M?.J1_12 P4.25 | length 1611.1
  Top Layer w10: M?.J1_12 3950.94,3655.94 4810.38,4515.38 ; 4813.23,4518.23 4810.38,4515.38 ; P4.25 5035.61,4685.61 5035.61,4665.61 4985,4615 4910,4615 4810.38,4515.38
B12: M?.J1_13 P4.2 | length 3430.9
  Top Layer w10: M?.J1_13 4015.3,3624.45 4633.53,4242.68 4655.65,4242.68 5089.53,4676.56 5089.53,5085.06 5083.79,5090.8 v2(5083.79,5096.21)
  Bottom Layer w10: P4.2 4146.21,5096.21 v2(5083.79,5096.21)
B13: M?.J1_14 P4.4 | length 3417
  Top Layer w10: M?.J1_14 4012.09,3592.95 4641.81,4222.68 4663.93,4222.68 5124.93,4683.67 v2(5124.93,5097.36)
  Bottom Layer w10: P4.4 4215,5065 5095,5065 5124.93,5094.93 v2(5124.93,5097.36)
B14: M?.J1_15 P4.6 | length 3393.6
  Top Layer w10: M?.J1_15 4008.87,3561.46 4650.09,4202.68 4672.22,4202.68 5165,4695.46 5165,5085.76 v2@5168.03,5088.79
  Bottom Layer w10: P4.6 4295,5045 5115,5045 v2(5165,5095)
B15: M?.J1_17 P4.8 | length 3430.3
  Top Layer w10: M?.J1_17 3974.17,3498.46 4658.38,4182.68 4680.5,4182.68 5226.78,4728.95 v2(5226.78,5096.21)
  Bottom Layer w10: P4.8 4375,5025 5155.57,5025 v2(5226.78,5096.21)
B16: M?.J1_18 P4.10 | length 3417.9
  Top Layer w10: M?.J1_18 3970.95,3466.97 4666.66,4162.68 4688.78,4162.68 5266.78,4740.67 v2(5266.78,5096.21)
  Bottom Layer w10: P4.10 4455,5005 5177.99,5005 5266.78,5093.79 v2(5266.78,5096.21)
B17: M?.J1_19 P4.12 | length 3404.1
  Top Layer w10: M?.J1_19 3967.74,3435.47 4674.95,4142.68 4697.07,4142.68 5306.78,4752.39 v2(5306.78,5096.21)
  Bottom Layer w10: P4.12 4535,4985 5197.99,4985 5306.78,5093.79 v2(5306.78,5096.21)
B18: M?.J1_20 P4.14 | length 3390.2
  Top Layer w10: M?.J1_20 3964.53,3403.98 4683.23,4122.68 4705.35,4122.68 5346.78,4764.1 v2(5346.78,5096.21)
  Bottom Layer w10: P4.14 4615,4965 5217.99,4965 5346.78,5093.79 v2(5346.78,5096.21)
B19: M?.J1_21 P4.16 | length 3379.7
  Top Layer w10: M?.J1_21 3961.32,3372.48 4691.51,4102.68 4713.64,4102.68 5387.92,4776.96 v2(5387.92,5097.36)
  Bottom Layer w10: P4.16 4695,4945 5237.99,4945 5387.92,5094.93 v2(5387.92,5097.36)
B20: M?.J1_22 P4.18 | length 3365.8
  Top Layer w10: M?.J1_22 3958.11,3340.98 4699.8,4082.68 4721.92,4082.68 5427.92,4788.68 v2(5427.92,5097.36)
  Bottom Layer w10: P4.18 4775,4925 5257.99,4925 5427.92,5094.93 v2(5427.92,5097.36)
B21: M?.J1_23 P4.20 | length 3352
  Top Layer w10: M?.J1_23 3954.9,3309.49 4708.08,4062.68 4730.2,4062.68 5467.92,4800.39 v2(5467.92,5097.36)
  Bottom Layer w10: P4.20 4855,4905 5277.99,4905 5467.92,5094.93 v2(5467.92,5097.36)
B22: M?.J1_24 P4.22 | length 3338.2
  Top Layer w10: M?.J1_24 3951.68,3277.99 4716.37,4042.68 4738.49,4042.68 5507.92,4812.11 v2(5507.92,5097.36)
  Bottom Layer w10: P4.22 4935,4885 5297.99,4885 5507.92,5094.93 v2(5507.92,5097.36)
B23: M?.J1_25 P4.24 | length 3314.8
  Top Layer w10: M?.J1_25 3948.47,3246.5 4724.65,4022.68 4746.77,4022.68 5547.99,4823.89 5547.99,5085.76 v2@5551.02,5088.79
  Bottom Layer w10: P4.24 5015,4865 5317.99,4865 v2(5547.99,5095)
BOOT0: M?.J1_16 R2.1 | length 1347.3
  Top Layer w10: R2.1 3645,4300 3690,4255 v2(3690,4105) ; v2(3800,3560) 3828.33,3531.67 3878.29,3531.67 M?.J1_16
  Bottom Layer w10: v2(3690,4105) 3800,3995 3800,3575 3799.14,3574.14 3799.14,3560.86 v2(3800,3560)
CSB-1: JP5.22 M?.J2_11 | length 2222.4
  Top Layer w10: M?.J2_11 5200.4,3687.44 5559.93,4046.96 5559.93,4119.13 5602.29,4161.5 5917.57,4161.5 6017.57,4061.5 v2(6020,4061.5)
  Bottom Layer w10: JP5.22 6020,3395 v2(6020,4061.5)
DRCTL-1: JP5.14 M?.J2_7 | length 1924.1
  Top Layer w10: M?.J2_7 5200.4,3813.43 5479.93,4092.95 5479.93,4152.27 5569.15,4241.5 5997.57,4241.5 6017.57,4221.5 v2(6020,4221.5)
  Bottom Layer w10: JP5.14 5920,3695 5920,4123.92 6017.57,4221.5 v2(6020,4221.5)
DRHOLD-1: JP5.15 M?.J2_19 | length 508.4
  Top Layer w10: M?.J2_19 5605.19,3435.47 5625.66,3415 JP5.15
DROVER-1: JP5.13 M?.J2_18 | length 519.8
  Top Layer w10: M?.J2_18 5591.97,3466.97 JP5.13
GND: C1.1 C2.1 C3.1 C4.1 C5.1 C6.1 C7.1 C8.1 C9.1 C10.1 D1.K D2.K JP4.1 JP5.23 JP5.24 JP5.25 JP5.26 M?.J1_31 M?.J1_32 P1.1 P1.3 P1.5 P2.3 R3.1 R5.1 SP1.1 SP2.1 SP3.1 SP4.1 SW1.2 U1.4 U2.3 U3.3 U4.3 U5.3
  other v1: 2800,2100 2900,2100 3000,2100 3100,2100 3200,2100 3300,2100 3400,2100 3500,2100 3600,2100 3700,2100 3800,2100 4200,2100 4300,2100 4700,2100 5200,2100 5300,2100 5400,2100 5500,2100 5600,2100 5700,2100 5800,2100 5900,2100 6000,2100 2950,2200 3050,2200 3450,2200 3850,2200 4250,2200 4750,2200 5150,2200 5450,2200 5550,2200 5850,2200 6150,2200 2700,2300 3000,2300 3100,2300 3200,2300 3300,2300 3400,2300 3500,2300 3600,2300 3900,2300 4100,2300 4200,2300 4300,2300 4500,2300 4600,2300 4700,2300 4800,2300 4900,2300 5100,2300 5400,2300 5600,2300 5700,2300 5800,2300 5900,2300 2750,2400 2850,2400 2950,2400 3050,2400 3150,2400 3250,2400 3350,2400 3650,2400 3750,2400 3850,2400 4150,2400 4250,2400 4350,2400 4550,2400 4650,2400 4750,2400 4850,2400 4950,2400 5050,2400 5150,2400 5350,2400 5550,2400 5650,2400 5750,2400 5850,2400 5950,2400 6050,2400 6150,2400 2700,2500 2800,2500 2900,2500 4200,2500 4300,2500 4400,2500 4500,2500 4700,2500 4800,2500 4900,2500 5100,2500 5300,2500 5400,2500 5600,2500 5700,2500 5800,2500 5900,2500 6000,2500 6100,2500 2750,2600 3550,2600 4050,2600 4350,2600 4450,2600 4550,2600 4750,2600 4850,2600 4950,2600 5050,2600 5150,2600 5350,2600 5550,2600 5650,2600 5750,2600 5850,2600 5950,2600 6050,2600 6150,2600 2700,2700 3400,2700 3700,2700 3800,2700 3900,2700 5300,2700 5400,2700 5600,2700 5700,2700 5800,2700 5900,2700 6000,2700 6100,2700 2950,2800 3050,2800 3450,2800 3550,2800 3750,2800 4250,2800 4650,2800 4750,2800 4950,2800 5150,2800 5550,2800 5650,2800 5750,2800 5850,2800 5950,2800 6050,2800 6150,2800 2800,2900 3000,2900 3100,2900 3200,2900 3300,2900 3400,2900 3600,2900 3700,2900 3900,2900 4000,2900 4400,2900 4600,2900 4700,2900 4800,2900 4900,2900 5800,2900 5900,2900 6000,2900 6100,2900 2950,3000 3050,3000 3350,3000 3450,3000 3550,3000 3650,3000 3750,3000 4650,3000 4750,3000 4850,3000 4950,3000 5550,3000 5850,3000 5950,3000 6050,3000 6150,3000 2800,3100 3000,3100 3400,3100 3600,3100 3800,3100 4300,3100 5800,3100 5900,3100 6000,3100 6100,3100 4350,3200 4550,3200 4750,3200 5450,3200 5550,3200 5950,3200 6050,3200 6150,3200 2700,3300 2800,3300 2900,3300 3000,3300 3800,3300 4500,3300 5400,3300 5500,3300 6000,3300 6100,3300 4350,3400 4450,3400 4550,3400 4650,3400 4750,3400 4850,3400 5050,3400 5250,3400 5350,3400 5450,3400 5550,3400 6050,3400 6150,3400 2700,3500 2800,3500 3000,3500 3300,3500 3400,3500 3600,3500 3800,3500 4300,3500 4400,3500 4500,3500 4600,3500 4700,3500 4800,3500 4900,3500 6100,3500 4350,3600 4450,3600 4550,3600 4650,3600 4750,3600 4850,3600 5050,3600 6050,3600 6150,3600 2700,3700 2800,3700 3000,3700 3300,3700 3400,3700 4500,3700 4600,3700 4700,3700 4800,3700 4900,3700 6100,3700 4150,3800 4550,3800 4650,3800 4750,3800 4850,3800 5050,3800 6050,3800 6150,3800 2700,3900 2800,3900 4700,3900 4800,3900 6100,3900 4350,4000 4850,4000 5050,4000 6050,4000 6150,4000 2700,4100 2800,4100 3300,4100 3900,4100 4900,4100 5200,4100 6100,4100 3750,4200 3850,4200 4550,4200 5150,4200 5250,4200 6150,4200 2700,4300 3700,4300 3800,4300 3900,4300 4100,4300 4200,4300 4300,4300 5100,4300 5300,4300 5400,4300 6100,4300 3550,4400 3750,4400 3850,4400 4750,4400 5350,4400 6150,4400 2700,4500 3600,4500 3700,4500 3800,4500 3900,4500 4100,4500 4200,4500 4300,4500 4400,4500 4500,4500 4600,4500 5300,4500 5600,4500 5700,4500 5800,4500 5900,4500 6000,4500 6100,4500 2850,4600 2950,4600 3050,4600 3250,4600 3350,4600 3450,4600 3550,4600 3750,4600 3850,4600 5550,4600 5750,4600 5850,4600 5950,4600 6050,4600 6150,4600 2700,4700 2800,4700 2900,4700 3000,4700 3100,4700 3600,4700 3700,4700 5500,4700 6000,4700 6100,4700 2750,4800 2850,4800 2950,4800 3050,4800 3150,4800 3250,4800 3750,4800 5950,4800 6050,4800 6150,4800 2700,4900 2800,4900 2900,4900 3000,4900 3100,4900 3200,4900 3600,4900 3700,4900 3800,4900 3900,4900 4000,4900 4100,4900 4200,4900 4300,4900 4400,4900 4500,4900 4600,4900 4700,4900 5600,4900 5700,4900 5800,4900 5900,4900 6000,4900 6100,4900 2750,5000 2850,5000 2950,5000 3050,5000 3250,5000 3350,5000 3450,5000 3550,5000 3650,5000 3750,5000 3850,5000 3950,5000 5650,5000 5750,5000 5850,5000 5950,5000 6050,5000 6150,5000 3000,5100 3100,5100 3200,5100 3300,5100 3400,5100 3500,5100 3600,5100 3700,5100 3800,5100 3900,5100 4000,5100 4100,5100 5600,5100 5700,5100 5800,5100 2950,5200 3050,5200 3150,5200 3250,5200 3350,5200 3450,5200 3550,5200 3650,5200 3750,5200 3850,5200 3950,5200 4050,5200 4150,5200 4250,5200 4350,5200 4450,5200 4550,5200 4650,5200 4750,5200 4850,5200 4950,5200 5050,5200 5150,5200 5250,5200 5350,5200 5450,5200 5550,5200 5650,5200 5750,5200 5850,5200
I2C1_SCL: M?.J1_27 U2.4 U3.4 | length 474.7
  Top Layer w10: M?.J1_27 3953.79,3183.5 3961.92,3175.37 3967.34,3175.37 v2(3971.16,3171.54) ; U3.4 4248.19,3163.6 4254.59,3170 v2(4260,3170)
  Bottom Layer w10: v2(3971.16,3171.54) 3972.71,3170 4143.69,3170 U2.4@4146.61,3167.07 ; U2.4 4147.83,3164.82 4147.83,3184.85 4149.04,3186.06 4149.04,3188.76 4162.61,3202.33 4237.77,3202.33 4256.17,3183.92 4256.17,3173.83 v2(4260,3170)
I2C1_SDA: M?.J1_26 U2.5 U3.5 | length 464.7
  Top Layer w10: M?.J1_26 3953.4,3215 3961.64,3223.24 3967.64,3223.24 v2(3971.47,3227.07) ; v2(4095,3250) 4098.71,3246.29 4098.71,3231.29 4122.41,3207.59 4207.39,3207.59 4220.96,3221.16 4220.96,3223.86 4222.17,3225.07 4222.17,3245.11 U3.5
  Bottom Layer w10: v2(3971.47,3227.07) 3971.47,3228.88 3988.91,3246.32 U2.5
I2C2_SCL: M?.J2_27 U4.4 U5.4 | length 557.8
  Top Layer w10: M?.J2_27 5202.79,3183.5 5250.4,3135.89 5250.4,3005.86 5265,2991.26 v2(5265,2990) ; U5.4 5405.55,2995 v2(5445,2995)
  Bottom Layer w10: v2(5265,2990) 5323.78,2990 U4.4 5328.35,2994.57 5328.35,3019.72 5337.13,3028.5 5426.5,3028.5 5441.17,3013.83 5441.17,2998.83 v2(5445,2995)
I2C2_SDA: M?.J2_26 U4.5 U5.5 | length 423.5
  Top Layer w10: M?.J2_26 5140.95,3214.17 5200.4,3214.17 5284.57,3130 5284.57,3101.69 5288.83,3097.43 5288.83,3084.21 5311.54,3061.5 5392.87,3061.5 5401.65,3070.28 5401.65,3095.43 U5.5
  Bottom Layer w10: v2(5285,3100) 5323.78,3100 U4.5
NetD1_A: D1.A R8.1 | length 154.9
  Top Layer w25: R8.1 D1.A
NetD2_A: D2.A R7.1 | length 157
  Top Layer w25: D2.A 2720,3120 R7.1
NetJP6_1: JP6.1 U2.1 U2.8 | length 1552.4
  Top Layer w10: JP6.1 3730,2195 4335,2800 v2(4335,3120)
  Bottom Layer w10: U2.1 4226.55,3160.44 4226.55,3135.86 4232.41,3130 4262.43,3130 4290,3157.57 ; U2.8 4246.55,3246.32 4290,3202.87 4290,3157.57 ; v2(4335,3120) 4329.59,3120 4322.09,3127.5 4320.07,3127.5 4290,3157.57
NetJP6_2: JP6.2 U2.7 | length 1686.7
  Bottom Layer w10: JP6.2 3556.77,2201.77 3591.77,2201.77 3601.05,2211.05 3601.05,2234.19 3610.32,2243.46 3633.46,2243.46 4395,3005 4395,3240 4335,3300 4228.75,3300 4200.22,3271.47 4200.22,3268.78 4199.01,3267.57 4199.01,3247.53 U2.7
NetJP7_1: JP7.1 U3.1 U3.8 | length 1625.5
  Top Layer w10: JP7.1 3338.46,2195 4080,2936.54 4080,3081.43 4146.61,3148.05 4146.61,3166.83 4143.45,3170 4105,3170 4065,3210 4065,3269.14 4075.86,3280 4132.97,3280 4145.4,3267.57 4145.4,3247.53 U3.8
NetJP7_2: JP7.2 U3.7 | length 1672.3
  Top Layer w10: JP7.2 3235.68,2195 3241.54,2200.86 3241.54,2234.68 3266.86,2260 3313.02,2260 3644.81,2591.79 4040,2986.98 4040,3275 4075,3310 4131.25,3310 4170.99,3270.26 4170.99,3247.53 U3.7
NetJP8_1: JP8.1 U4.1 U4.8 | length 1322.9
  Bottom Layer w10: U4.1 5403.39,2981.02 5419.41,2965 5457.43,2965 ; U4.8 5427.24,3097.17 5475,3049.41 5475,2982.57 5457.43,2965 ; JP8.1 5702.39,2177.39 5702.39,2157.39 5680,2135 5575,2135 5457.43,2252.57 5457.43,2965
NetJP8_2: JP8.2 U4.7 | length 1127.2
  Bottom Layer w10: U4.7 5379.53,3098.9 5379.53,3124.05 5390.48,3135 5479.14,3135 5495,3119.14 5495,2330 JP8.2
NetJP9_1: JP9.1 U5.1 U5.8 | length 1239.3
  Top Layer w10: v2(5285,3030) 5288.83,3026.17 5288.83,3013.64 5308.61,2993.85 5325.59,2993.85 U5.1 ; v2(5293.5,3163.5) 5297.33,3159.67 5297.33,3152.67 5324.35,3125.65 5324.35,3099.43 U5.8
  Bottom Layer w10: v2(5293.5,3163.5) 5293.5,3158.09 5285,3149.59 5285,3142.43 5255,3112.43 5255,3060 5282.29,3032.71 v2(5285,3030) 5279.59,3030 5269.59,3020 5252.57,3020 5235,3002.43 5235,2350 JP9.1
NetJP9_2: JP9.2 U5.7 | length 1249.9
  Top Layer w10: v2(5275,3225) 5285,3215 5285,3214.43 5323.5,3175.93 5323.5,3163.51 5350.47,3136.54 5350.47,3098.9 U5.7
  Bottom Layer w10: v2(5275,3225) 5210,3160 5210,2275 JP9.2
NetP2_2: P2.2 R2.2 | length 157.1
  Top Layer w10: P2.2 3495.04,4820.04 R2.2
NetR3_2: R3.2 U2.6 | length 84.8
  Bottom Layer w10: U2.6 4172.2,3327.17 R3.2
NetR4_2: R4.2 U3.6 | length 110.6
  Top Layer w10: R4.2 4197.8,3327.68 U3.6 4199.01,3247.53 4199.01,3267.57 4200.22,3268.78 4200.22,3271.47
NetR5_2: R5.2 U5.6 | length 89
  Top Layer w10: R5.2 5377.8,3182.2 U5.6
NetR6_2: R6.2 U4.6 | length 89
  Bottom Layer w10: U4.6 5353.94,3098.9 5353.94,3124.05 5355,3125.11 R6.2
OSK-1: JP5.12 M?.J2_6 | length 1849.2
  Top Layer w10: M?.J2_6 5200.4,3844.92 5459.93,4104.44 5459.93,4160.55 5560.87,4261.5 v2(6020,4261.5)
  Bottom Layer w10: JP5.12 5900,3775 5900,4143.92 6017.57,4261.5 v2(6020,4261.5)
PDCLK-1: JP5.5 M?.J2_14 | length 633.3
  Top Layer w10: M?.J2_14 5317.95,3592.95 JP5.5
PF0-1: JP5.9 M?.J2_16 | length 576.5
  Top Layer w10: M?.J2_16 5454.96,3529.96 JP5.9
PF1-1: JP5.8 M?.J2_4 | length 1732.5
  Top Layer w10: M?.J2_4 5200.4,3907.91 5419.93,4127.44 5419.93,4177.12 5584.3,4341.5 v2(6020,4341.5)
  Bottom Layer w10: JP5.8 5860,3935 5860,4183.92 6017.57,4341.5 v2(6020,4341.5)
PF2-1: JP5.7 M?.J2_15 | length 604.9
  Top Layer w10: M?.J2_15 5386.46,3561.46 JP5.7
PLL-LOCK-1: JP5.3 M?.J2_13 | length 661.6
  Top Layer w10: M?.J2_13 5249.45,3624.45 JP5.3
PWR-1: JP5.2 M?.J2_1 | length 1557.4
  Top Layer w10: M?.J2_1 5200.4,4002.4 5359.93,4161.92 5359.93,4201.97 5619.45,4461.5 v2(6020,4461.5)
  Bottom Layer w10: JP5.2 5740,4183.92 6017.57,4461.5 v2(6020,4461.5)
RESET: C2.2 M?.J1_1 R1.1 SW1.1 | length 1401.5
  Top Layer w10: SW1.1 3179.21,4957.47 3203.74,4932.94 3213.58,4932.94 3286.61,4859.92 R1.1 C2.2 3348.12,4746.92 3373.08,4746.92 3400,4720 3400,4510 3640,4270 3640,4090 3680,4050 3832.4,4050 3863.97,4018.43 3863.97,4004.29 3865.86,4002.4 M?.J1_1
RESET-1: JP5.1 M?.J2_12 | length 701.4
  Top Layer w10: M?.J2_12 5200.4,3655.94 5579.93,4035.47 5579.93,4054.93 JP5.1
RSO-1: JP5.4 M?.J2_2 | length 1615.8
  Top Layer w10: M?.J2_2 5200.4,3970.91 5379.93,4150.43 5379.93,4193.69 5607.73,4421.5 v2(6020,4421.5)
  Bottom Layer w10: JP5.4 5820,4095 5820,4223.92 6017.57,4421.5 v2(6020,4421.5)
SCLK-1: JP5.20 M?.J2_10 | length 2148.9
  Top Layer w10: M?.J2_10 5200.4,3718.94 5539.93,4058.46 5539.93,4127.42 5594.01,4181.5 5937.57,4181.5 6017.57,4101.5 v2(6020,4101.5)
  Bottom Layer w10: JP5.20 5980,3455 5980,4063.92 6017.57,4101.5 v2(6020,4101.5)
SDIO-1: JP5.16 M?.J2_8 | length 1999
  Top Layer w10: M?.J2_8 5200.4,3781.93 5499.93,4081.45 5499.93,4143.98 5577.44,4221.5 5977.57,4221.5 6017.57,4181.5 v2(6020,4181.5)
  Bottom Layer w10: JP5.16 5940,3615 5940,4103.92 6017.57,4181.5 v2(6020,4181.5)
SDO-1: JP5.18 M?.J2_9 | length 2074
  Top Layer w10: M?.J2_9 5200.4,3750.43 5519.93,4069.96 5519.93,4135.7 5585.72,4201.5 5957.57,4201.5 6017.57,4141.5 v2(6020,4141.5)
  Bottom Layer w10: JP5.18 5960,3535 5960,4083.92 6017.57,4141.5 v2(6020,4141.5)
SYNC-CLK-1: JP5.10 M?.J2_5 | length 1790.8
  Top Layer w10: M?.J2_5 5200.4,3876.42 5439.93,4115.94 5439.93,4168.84 5572.59,4301.5 v2(6020,4301.5)
  Bottom Layer w10: JP5.10 5880,3855 5880,4163.92 6017.57,4301.5 v2(6020,4301.5)
TXENABLE-1: JP5.6 M?.J2_3 | length 1674.1
  Top Layer w10: M?.J2_3 5200.4,3939.41 5399.93,4138.93 5399.93,4185.4 5596.02,4381.5 v2(6020,4381.5)
  Bottom Layer w10: JP5.6 5840,4015 5840,4203.92 6017.57,4381.5 v2(6020,4381.5)
UPDATE-1: JP5.11 M?.J2_17 | length 548.1
  Top Layer w10: M?.J2_17 5523.46,3498.46 JP5.11
USART1_RX: JP10.2 M?.J2_56 | length 1511.3
  Top Layer w10: M?.J2_56 4970.76,3878.31 4932.37,3878.31 4924.65,3886.02 4920.69,3886.02 4892.37,3914.35 4892.37,4023.79 5648.58,4780 JP10.2
USART1_TX: JP10.1 M?.J2_57 | length 1358.6
  Top Layer w10: 4925,3910 4912.37,3922.63 4912.37,4015.5 5230.39,4333.52 5358.52,4333.52 5705,4680 JP10.1
VREF: M?.J2_31 U1.6 | length 130.5
  Top Layer w10: U1.6 4971.66,3090 M?.J2_31
pads on no net: JP5.17 JP5.19 JP5.21 M?.J1_28 M?.J2_20 M?.J2_21 M?.J2_22 M?.J2_23 M?.J2_30 M?.J2_32 M?.J2_33 M?.J2_34 M?.J2_35 M?.J2_36 M?.J2_39 M?.J2_40 M?.J2_41 M?.J2_42 M?.J2_43 M?.J2_44 M?.J2_45 M?.J2_46 M?.J2_47 M?.J2_48 M?.J2_49 M?.J2_50 M?.J2_51 M?.J2_52 M?.J2_53 M?.J2_54 M?.J2_55 M?.J2_58 M?.J2_59 M?.J2_60 P4.26 U1.1 U1.3 U1.5 U1.7 U1.8

## Polygon pours and split planes (outlines as drawn)
GND on Top Layer "GND_L01_P000" (solid, pour order 0): 2639.99,2264.16 2639.99,5115 cw(c2805,5115) 2805,5280.02 6012.95,5280.02 cw(c6012.95,5122.95) 6170.02,5122.95 6170.02,2247.08 cw(c6002.92,2247.08) 6002.92,2079.99 2824.16,2079.99 cw(c2824.16,2264.16)
GND on Bottom Layer "GND_L02_P001" (solid, pour order 1): 2639.99,2264.16 2639.99,5115 cw(c2805,5115) 2805,5280.02 6012.95,5280.02 cw(c6012.95,5122.95) 6170.02,5122.95 6170.02,2247.08 cw(c6002.92,2247.08) 6002.92,2079.99 2824.16,2079.99 cw(c2824.16,2264.16)

## Other copper
Top Layer:
  rectangle net +5: 3830,3045 4015,3130

## Silkscreen, mask and mechanical layers (free items; w line width, h text height)
Top Overlay:
  text "BOOT0" at 3405,4990 h40
  text "PC8" at 3825,4990 h40 r270
  text "PD2" at 3925,4990 h40 r270
  text "PD3" at 4025,4990 h40 r270
  text "PG12" at 4125,4990 h40 r270
  text "PG11" at 4225,4990 h40 r270
  text "PG13" at 4325,4990 h40 r270
  text "PG14" at 4425,4990 h40 r270
  text "PG10" at 4525,4990 h40 r270
  text "PB4" at 4625,4990 h40 r270
  text "PB3" at 4725,4990 h40 r270
  text "PB2" at 4825,4990 h40 r270
  text "PB7" at 4925,4990 h40 r270
  text "NC" at 5025,4990 h40 r270
  text "0" at 3560,4895 h40
  text "RST" at 2985,4790 h40
  text "1" at 3565,4685 h40
  text "USART1" at 5355,4685.01 h80
  text "PJ0" at 3825,4635 h40 r270
  text "PI15" at 3925,4635 h40 r270
  text "PA0" at 4025,4635 h40 r270
  text "PH7" at 4125,4635 h40 r270
  text "PH6" at 4225,4635 h40 r270
  text "PG3" at 4325,4635 h40 r270
  text "PG7" at 4425,4635 h40 r270
  text "PI18" at 4525,4635 h40 r270
  text "PB5" at 4625,4635 h40 r270
  text "PC11" at 4725,4635 h40 r270
  text "PC10" at 4825,4635 h40 r270
  text "PC9" at 4925,4635 h40 r270
  text "PC12" at 5025,4635 h40 r270
  text "PI12" at 2960,4200 h40
  text "Pk1" at 3310,4200 h40
  text "PI13" at 2960,4100 h40
  text "Pk0" at 3310,4100 h40
  text "PI14" at 2960,4000 h40
  text "PJ11" at 3310,4000 h40
  text "PK7" at 2960,3900 h40
  text "PJ10" at 3310,3900 h40
  text "PK6" at 2960,3800 h40
  text "PJ9" at 3310,3800 h40
  text "AD9910" at 5930.01,3710 h80 r270
  text "PK5" at 2960,3700 h40
  text "PJ8" at 3310,3700 h40
  text "PK4" at 2960,3600 h40
  text "PJ7" at 3310,3600 h40
  text "PK3" at 2960,3500 h40
  text "PJ6" at 3310,3500 h40
  text "PJ15" at 2960,3400 h40
  text "PJ5" at 3310,3400 h40
  text "PJ14" at 2960,3300 h40
  text "PJ4" at 3310,3300 h40
  text "5.0" at 2680,3260 h40
  text "3.3" at 2845,3260 h40
  text "PJ13" at 2960,3200 h40
  text "PJ3" at 3310,3200 h40
  text "PJ12" at 2960,3100 h40
  text "PJ2" at 3310,3100 h40
  text "Pk2" at 2960,3000 h40
  text "PJ1" at 3310,3000 h40
  text "GND" at 3175,2875 h40
  text "+3.3" at 3160,2600 h40
  text "R2" at 5300,2390.01 h80
  text "R1" at 5635,2390.01 h80
  text "R3" at 3560,2360.01 h80
  text "R4" at 3200,2355.01 h80
  text "ADC1" at 3895,2330.01 h80
  text "ADC2" at 4360,2330.01 h80
  text "ADC3" at 4840,2325.01 h80
Mechanical 1:
  lines w10: 2650,5120 ccw(c2650,5115) 2645,5115 ; 2645,5115 cw(c2805,5115) 2805,5275 6012.95,5275 cw(c6012.95,5122.95) 6165,5122.95 6165,2247.08 cw(c6002.92,2247.08) 6002.92,2085 2824.16,2085 cw(c2824.16,2264.16) 2645,2264.16 2645,5115

## Text inside footprints (layer, text, board x,y; h text height)
JP5: Top Overlay "2" at 5720,4375 h40 r270; Top Overlay "1" at 5620,4365 h40 r270; Top Overlay "26" at 5712,2703 h40 r270; Top Overlay "25" at 5612,2703 h40 r270
M?: Top Overlay "J2" at 5077.31,2877.72 h35 r90; Top Overlay "J1" at 3817.31,2892.72 h35 r90